# EAGLE board FlightPCB (EAGLE 9.5.2)
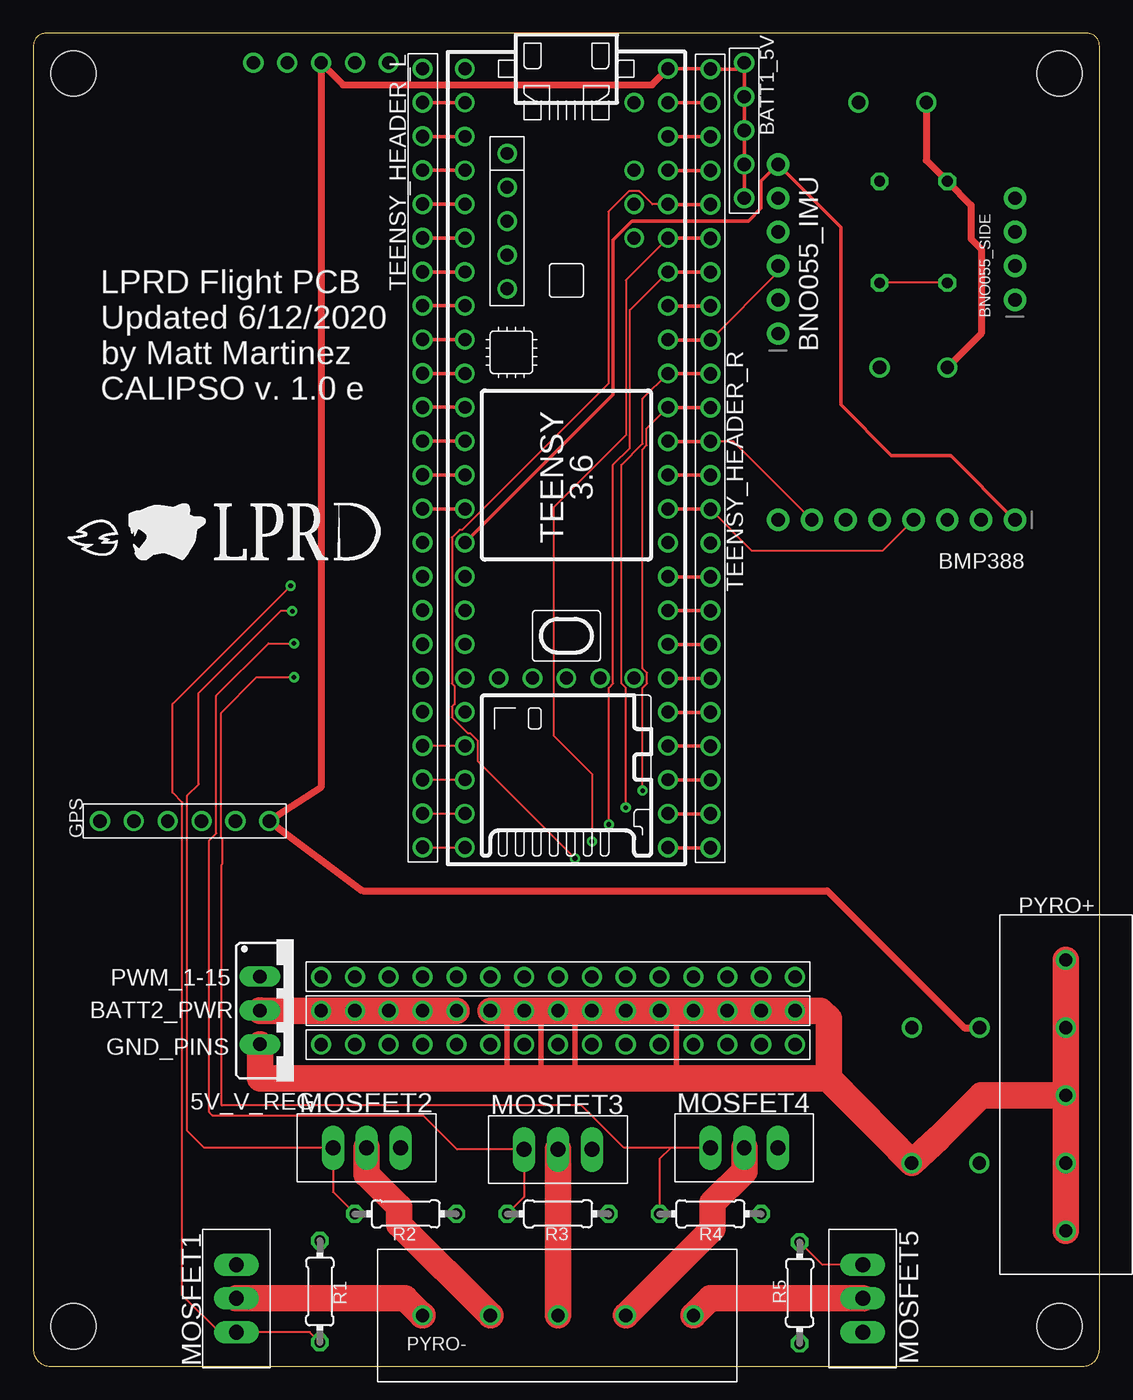
[diagram p0: board, top side]
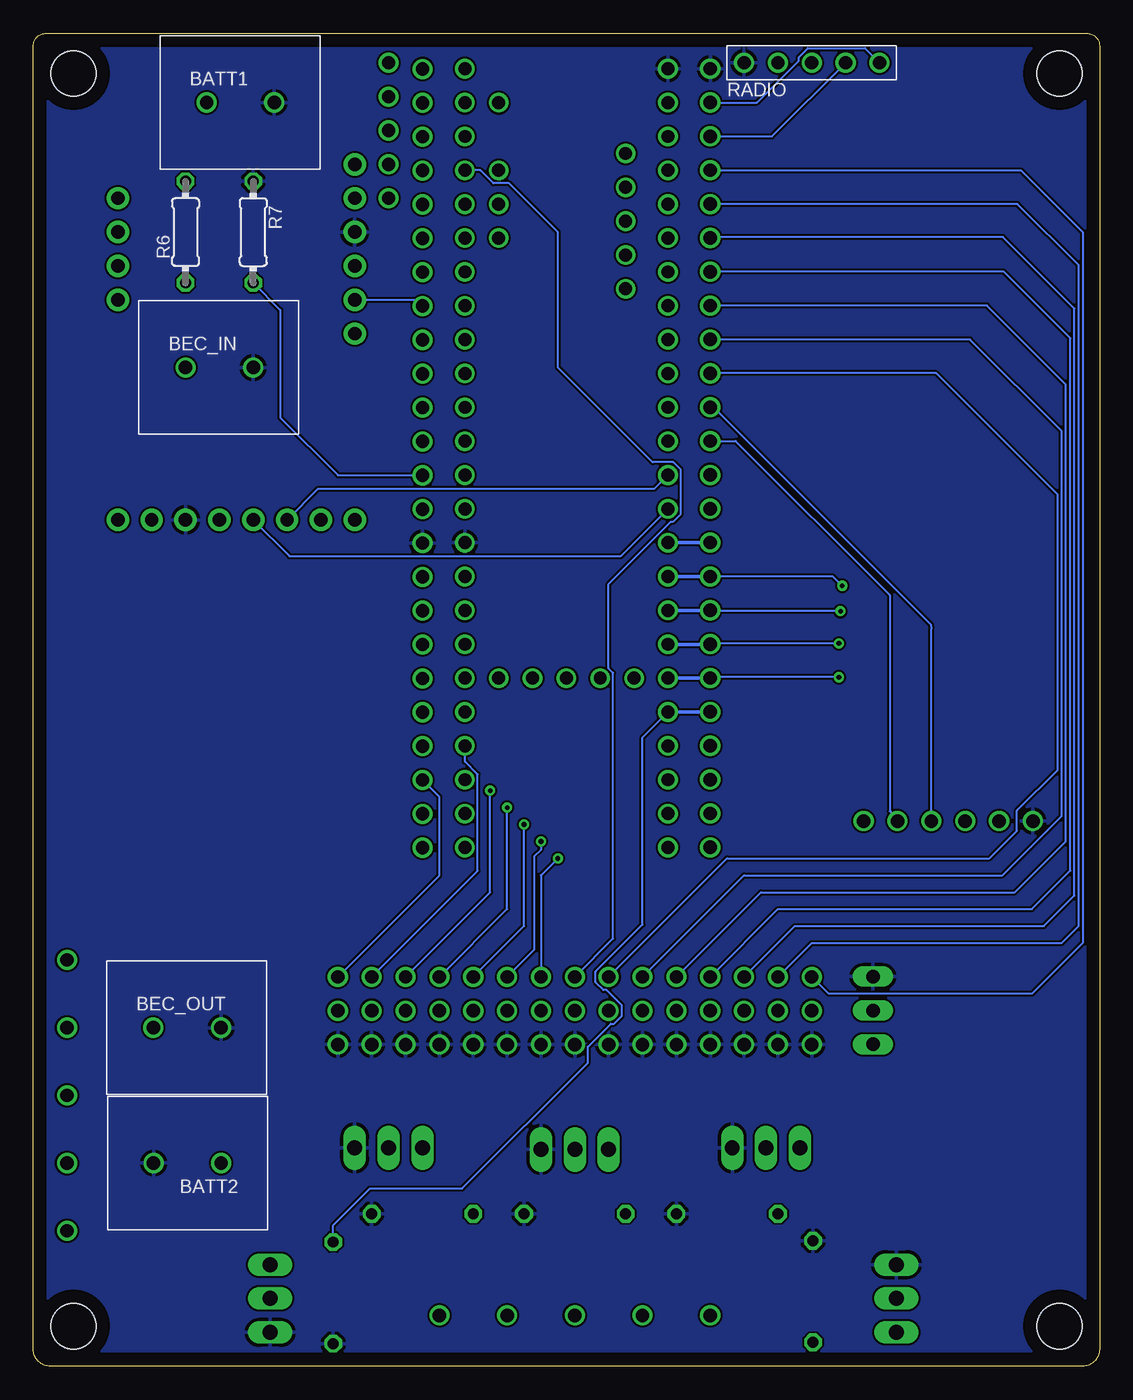
[diagram p1: board, bottom side, seen from below]

Size 80 x 100 mm. Coordinates in mm from the lower left corner, seen from the top.
Outline: 79.06,100 0.94,100 arc90 0,99.06 0,1.27 arc90 1.27,0 78.74,0 arc90 80,1.26 80,99.06 arc90 79.06,100
Copper layers (1*16): Top 0.035mm / dielectric 1.5mm / Bottom 0.035mm
Design rules "default *": minimum track width 6mil, minimum drill 0.35mm, track to track 6mil, track to pad 6mil, pad to pad 6mil, via to via 6mil, smd to smd 6mil, copper to edge 40mil, drill to drill 6mil, minimum pad ring 10mil, minimum via ring 8mil, stop-mask expansion 4mil, vias tented up to drill 0mil, thermal gap 10mil
Net classes: 1 Power Delivery: width 0.25 mm
Holes 3.4 mm at 3,97 3,3 77,97 77,3

## Footprints (pad centres in the part's own frame; a part is rotated, then mirrored left to right if it is on the bottom)
TO220S = drill 1.016 long: 1 -2.54,-2.54; 2 0,-2.54; 3 2.54,-2.54
TERMINAL_BLOCK_2_PIN_5MM = drill 1: P1 0,0; P2 0,-5.08
PIN_HEADER_5 = drill 1: P1 0,1.27; P2 0,-1.27; P3 0,-3.81; P4 0,-6.35; P5 0,-8.89
PIN_HEADER_15 = drill 1: P1 0,1.27; P2 0,-1.27; P3 0,-3.81; P4 0,-6.35; P5 0,-8.89; P6 0,-11.43; P7 0,-13.97; P8 0,-16.51; P9 0,-19.05; P10 0,-21.59; P11 0,-24.13; P12 0,-26.67; P13 0,-29.21; P14 0,-31.75; P15 0,-34.29
MICROBUILDER_1X08_ROUND = drill 1 pad 1.676: 1 -8.89,0; 2 -6.35,0; 3 -3.81,0; 4 -1.27,0; 5 1.27,0; 6 3.81,0; 7 6.35,0; 8 8.89,0
MICROBUILDER_1X06_ROUND = drill 1 pad 1.676: 1 -6.35,0; 2 -3.81,0; 3 -1.27,0; 4 1.27,0; 5 3.81,0; 6 6.35,0
MICROBUILDER_1X04_ROUND = drill 1 pad 1.676: 1 -3.81,0; 2 -1.27,0; 3 1.27,0; 4 3.81,0
TEENSY_3.5/3.6 = drill 0.965: 0/RX -25.4,-7.62; 1/TX -22.86,-7.62; 2 -20.32,-7.62; 3/CANTX -17.78,-7.62; 3V3 7.62,-7.62; 3V3_2 17.78,-2.54; 3V3_LO -22.86,7.62; 4/CANRX -15.24,-7.62; 5 -12.7,-7.62; 6 -10.16,-7.62; 7 -7.62,-7.62; 8 -5.08,-7.62; 9/CS -2.54,-7.62; 10/CS 0,-7.62; 11/MOSI 2.54,-7.62; 12/MISO 5.08,-7.62; 13/SCK 5.08,7.62; 14/A0 2.54,7.62; 15/A1 0,7.62; 16/A2 -2.54,7.62; 17/A3 -5.08,7.62; 18/A4/SDA -7.62,7.62; 19/A5/SCL -10.16,7.62; 20/A6 -12.7,7.62; 21/A7 -15.24,7.62; 21/DAC0 12.7,7.62; 22/A8 -17.78,7.62; 23/A9 -20.32,7.62; 24 10.16,-7.62; 25 12.7,-7.62; 26 15.24,-7.62; 27 17.78,-7.62; 28 20.32,-7.62; 29 22.86,-7.62; 30 25.4,-7.62; 31/A12 27.94,-7.62; 32/A13 30.48,-7.62; 33/A14 30.48,7.62; 34/A15 27.94,7.62; 35/A16 25.4,7.62; 36/A17 22.86,7.62; 37/A18 20.32,7.62; 38/A19 17.78,7.62; 39/A20 15.24,7.62; A10 -17.78,5.08; A11 -15.24,5.08; A22/DAC1 10.16,7.62; AGND -25.4,7.62; AREF -20.32,5.08; GND -27.94,-7.62; GND2 7.62,7.62; GND3 17.78,0; PROG 17.78,2.54; RESET 17.78,5.08; U5V -21.59,-4.445; UD+ -16.51,-4.445; UD- -19.05,-4.445; UGND1 -13.97,-4.445; UGND2 -11.43,-4.445; VBAT 17.78,-5.08; VIN -27.94,7.62; VUSB -25.4,5.08
NEO_M8N_GPS_BREAKOUT = drill 1: P1 0,0; P2 0,-2.54; P3 0,-5.08; P4 0,-7.62; P5 0,-10.16; P6 0,-12.7
TO220BH_SIMPLE = drill 1.118 long: D 0,-6.35; G -2.54,-6.35; S 2.54,-6.35
TERMINAL_BLOCK_5_PIN_5MM = drill 1: P1 0,0; P2 0,-5.08; P3 0,-10.16; P4 0,-15.24; P5 0,-20.32
0204/7 = drill 0.813 octagon: 1 -3.81,0; 2 3.81,0
RFD900 = drill 1: 1 0,1.27; 2 0,-1.27; 3 0,-3.81; 4 0,-6.35; 5 0,-8.89
PIN_HEADER_24_TEENSY_RAIL = drill 1: P1 0,1.27; P2 0,-1.27; P3 0,-3.81; P4 0,-6.35; P5 0,-8.89; P6 0,-11.43; P7 0,-13.97; P8 0,-16.51; P9 0,-19.05; P10 0,-21.59; P11 0,-24.13; P12 0,-26.67; P13 0,-29.21; P14 0,-31.75; P15 0,-34.29; P16 0,-36.83; P17 0,-39.37; P18 0,-41.91; P19 0,-44.45; P20 0,-46.99; P21 0,-49.53; P22 0,-52.07; P23 0,-54.61; P24 0,-57.15

## Placement (x,y rotation side)
5V_V_REG  LM1086TO220V  [TO220S]  19.54,26.69 270 top
BATT1  2-4S LIPO  [TERMINAL_BLOCK_2_PIN_5MM]  67,94.81 90 bottom
BATT1_5V  [PIN_HEADER_5]  53.34,96.52 0 top
BATT2  2-6S LIPO (>5.6V)  [TERMINAL_BLOCK_2_PIN_5MM]  65.9,15.24 270 bottom
BATT2_PWR  1-10=Batt2, 11-15=5V Reg  [PIN_HEADER_15]  55.88,26.67 270 top
BEC_IN  [TERMINAL_BLOCK_2_PIN_5MM]  68.58,74.93 90 bottom
BEC_OUT  [TERMINAL_BLOCK_2_PIN_5MM]  71,25.4 90 bottom
BMP388  [MICROBUILDER_1X08_ROUND]  64.77,63.5 180 top
BNO055_IMU  [MICROBUILDER_1X06_ROUND]  55.88,83.82 90 top
BNO055_SIDE  [MICROBUILDER_1X04_ROUND]  73.66,83.82 90 top
FLIGHT_COMPUTER  TEENSY_3.5/3.6  [TEENSY_3.5/3.6]  40,69.4 270 top
GND_PINS  [PIN_HEADER_15]  22.86,24.13 90 top
GPS  [NEO_M8N_GPS_BREAKOUT]  5,40.89 90 top
MOSFET1  IRLZ44Z  [TO220BH_SIMPLE]  8.89,5.08 90 top
MOSFET2  IRLZ44Z  [TO220BH_SIMPLE]  25.02,22.73 0 top
MOSFET3  IRLZ44Z  [TO220BH_SIMPLE]  39.37,22.61 0 top
MOSFET4  IRLZ44Z  [TO220BH_SIMPLE]  53.34,22.73 0 top
MOSFET5  IRLZ44Z  [TO220BH_SIMPLE]  68.58,5.08 270 top
PWM_1-15  [PIN_HEADER_15]  22.86,29.21 90 top
PYRO+  [TERMINAL_BLOCK_5_PIN_5MM]  77.47,30.48 0 top
PYRO-  [TERMINAL_BLOCK_5_PIN_5MM]  29.21,3.81 90 top
R1  10k  [0204/7]  21.5,5.6 90 top
R2  10k  [0204/7]  27.94,11.43 0 top
R3  10k  [0204/7]  39.37,11.43 0 top
R4  10k  [0204/7]  50.8,11.43 0 top
R5  10k  [0204/7]  57.5,5.5 270 top
R6  10k  [0204/7]  68.58,85.09 90 bottom
R7  2k  [0204/7]  63.5,85.09 270 bottom
RADIO  [RFD900]  25.4,97.79 90 bottom
TEENSY_HEADER_L  [PIN_HEADER_24_TEENSY_RAIL]  29.21,40.2 180 top
TEENSY_HEADER_R  [PIN_HEADER_24_TEENSY_RAIL]  50.8,96.05 0 top

## Library data of the parts
5V_V_REG = v-reg-2
BATT1 BATT1_5V BATT2 BATT2_PWR BEC_IN BEC_OUT GND_PINS GPS PWM_1-15 PYRO+ PYRO- RADIO TEENSY_HEADER_L TEENSY_HEADER_R = MattMtzLPRD
BMP388 = Adafruit BMP388
BNO055_IMU BNO055_SIDE = Adafruit BNO055
FLIGHT_COMPUTER = Teensy356
MOSFET1-MOSFET5 = transistor-power_MOD
R1-R7 = rcl; SPICEPREFIX: R

## Nets
+3V3 [Power Delivery]: BMP388.1 BNO055_IMU.6 FLIGHT_COMPUTER.3V3 TEENSY_HEADER_L.P10
+5V [Power Delivery]: BATT1_5V.P1 BATT1_5V.P2 BATT1_5V.P3 BATT1_5V.P4 BATT1_5V.P5 BEC_OUT.P1 FLIGHT_COMPUTER.VIN GPS.P6 RADIO.3 TEENSY_HEADER_R.P1
+5V/1 [Power Delivery]: 5V_V_REG.2 BATT2_PWR.P11 BATT2_PWR.P12 BATT2_PWR.P13 BATT2_PWR.P14 BATT2_PWR.P15
BATT1_READ_V: FLIGHT_COMPUTER.14/A0 R6.1 R7.2 TEENSY_HEADER_R.P13
BATT1_VCC [Power Delivery]: BATT1.P1 BEC_IN.P1 R6.2
BMP388_CS0: BMP388.7 FLIGHT_COMPUTER.15/A1 TEENSY_HEADER_R.P12
BMP388_SCK: BMP388.4 FLIGHT_COMPUTER.13/SCK TEENSY_HEADER_R.P14
BMP388_SDI/MOSI: BMP388.6 FLIGHT_COMPUTER.11/MOSI TEENSY_HEADER_L.P12
BMP388_SDO/MISO: BMP388.5 FLIGHT_COMPUTER.12/MISO TEENSY_HEADER_L.P11
BNO055_SCL: BNO055_IMU.2 FLIGHT_COMPUTER.19/A5/SCL TEENSY_HEADER_R.P8
BNO055_SDA: BNO055_IMU.3 FLIGHT_COMPUTER.18/A4/SDA TEENSY_HEADER_R.P9
CH1: MOSFET1.D PYRO-.P1
CH2: MOSFET2.D PYRO-.P2
CH3: MOSFET3.D PYRO-.P3
CH4: MOSFET4.D PYRO-.P4
CH5: MOSFET5.D PYRO-.P5
GND [Power Delivery]: 5V_V_REG.1 BATT1.P2 BATT2.P2 BEC_IN.P2 BEC_OUT.P2 BMP388.3 BNO055_IMU.4 FLIGHT_COMPUTER.GND FLIGHT_COMPUTER.GND2 GND_PINS.P1 GND_PINS.P2 GND_PINS.P3 GND_PINS.P4 GND_PINS.P5 GND_PINS.P6 GND_PINS.P7 GND_PINS.P8 GND_PINS.P9 GND_PINS.P10 GND_PINS.P11 GND_PINS.P12 GND_PINS.P13 GND_PINS.P14 GND_PINS.P15 GPS.P1 MOSFET1.S MOSFET2.S MOSFET3.S MOSFET4.S MOSFET5.S R1.2 R2.2 R3.2 R4.2 R5.2 R7.1 RADIO.1 TEENSY_HEADER_L.P24 TEENSY_HEADER_R.P15
GPS_RX: FLIGHT_COMPUTER.10/CS GPS.P5 TEENSY_HEADER_L.P13
GPS_TX: FLIGHT_COMPUTER.9/CS GPS.P4 TEENSY_HEADER_L.P14
N$1: FLIGHT_COMPUTER.AGND TEENSY_HEADER_R.P2
N$2: FLIGHT_COMPUTER.3V3_LO TEENSY_HEADER_R.P3
N$3: FLIGHT_COMPUTER.32/A13 TEENSY_HEADER_L.P1
N$5: FLIGHT_COMPUTER.31/A12 TEENSY_HEADER_L.P2
N$6: FLIGHT_COMPUTER.30 TEENSY_HEADER_L.P3
N$37: FLIGHT_COMPUTER.29 TEENSY_HEADER_L.P4
N$48: FLIGHT_COMPUTER.A22/DAC1 TEENSY_HEADER_R.P16
N$49: FLIGHT_COMPUTER.21/DAC0 TEENSY_HEADER_R.P17
N$50: FLIGHT_COMPUTER.39/A20 TEENSY_HEADER_R.P18
N$51: FLIGHT_COMPUTER.38/A19 TEENSY_HEADER_R.P19
N$52: FLIGHT_COMPUTER.37/A18 TEENSY_HEADER_R.P20
N$55: FLIGHT_COMPUTER.34/A15 TEENSY_HEADER_R.P23
N$56: FLIGHT_COMPUTER.33/A14 TEENSY_HEADER_R.P24
PWM2/3: FLIGHT_COMPUTER.3/CANTX PWM_1-15.P2 TEENSY_HEADER_L.P20
PWM3/4: FLIGHT_COMPUTER.4/CANRX PWM_1-15.P3 TEENSY_HEADER_L.P19
PWM4/5: FLIGHT_COMPUTER.5 PWM_1-15.P4 TEENSY_HEADER_L.P18
PWM5/6: FLIGHT_COMPUTER.6 PWM_1-15.P5 TEENSY_HEADER_L.P17
PWM6/7: FLIGHT_COMPUTER.7 PWM_1-15.P6 TEENSY_HEADER_L.P16
PWM7/8: FLIGHT_COMPUTER.8 PWM_1-15.P7 TEENSY_HEADER_L.P15
PWM8/23/A9: FLIGHT_COMPUTER.23/A9 PWM_1-15.P8 TEENSY_HEADER_R.P4
PWM9/22/A8: FLIGHT_COMPUTER.22/A8 PWM_1-15.P9 TEENSY_HEADER_R.P5
PWM10/21/A7: FLIGHT_COMPUTER.21/A7 PWM_1-15.P10 TEENSY_HEADER_R.P6
PWM11/20/A6: FLIGHT_COMPUTER.20/A6 PWM_1-15.P11 TEENSY_HEADER_R.P7
PWM12/17/A3: FLIGHT_COMPUTER.17/A3 PWM_1-15.P12 TEENSY_HEADER_R.P10
PWM13/16/A2: FLIGHT_COMPUTER.16/A2 PWM_1-15.P13 TEENSY_HEADER_R.P11
PWM14/36/A17: FLIGHT_COMPUTER.36/A17 PWM_1-15.P14 TEENSY_HEADER_R.P21
PWM15/35/A16: FLIGHT_COMPUTER.35/A16 PWM_1-15.P15 TEENSY_HEADER_R.P22
PWN1/2: FLIGHT_COMPUTER.2 PWM_1-15.P1 TEENSY_HEADER_L.P21
PYRO1: FLIGHT_COMPUTER.24 MOSFET1.G R1.1 TEENSY_HEADER_L.P9
PYRO2: FLIGHT_COMPUTER.25 MOSFET2.G R2.1 TEENSY_HEADER_L.P8
PYRO3: FLIGHT_COMPUTER.26 MOSFET3.G R3.1 TEENSY_HEADER_L.P7
PYRO4: FLIGHT_COMPUTER.27 MOSFET4.G R4.1 TEENSY_HEADER_L.P6
PYRO5: FLIGHT_COMPUTER.28 MOSFET5.G R5.1 TEENSY_HEADER_L.P5
RADIO_RX: FLIGHT_COMPUTER.1/TX RADIO.4 TEENSY_HEADER_L.P22
RADIO_TX: FLIGHT_COMPUTER.0/RX RADIO.5 TEENSY_HEADER_L.P23
VCC [Power Delivery]: 5V_V_REG.3 BATT2.P1 BATT2_PWR.P1 BATT2_PWR.P2 BATT2_PWR.P3 BATT2_PWR.P4 BATT2_PWR.P5 BATT2_PWR.P6 BATT2_PWR.P7 BATT2_PWR.P8 BATT2_PWR.P9 BATT2_PWR.P10 PYRO+.P1 PYRO+.P2 PYRO+.P3 PYRO+.P4 PYRO+.P5

## Tracks (layer width: path | path; a pad name or v marks a point on that pad's centre or on a via)
+3V3
  Top 0.25: BMP388.1 68.83,68.33 64.39,68.33 60.59,72.13 60.59,85.46 BNO055_IMU.6 54.61,88.9 54.61,86.87 53.65,85.91 44.92,85.91 43.49,84.49 43.49,72.89 FLIGHT_COMPUTER.3V3
  Bottom 0.25: FLIGHT_COMPUTER.3V3 TEENSY_HEADER_L.P10
+5V
  Top 0.25: FLIGHT_COMPUTER.VIN 50.78,97.34 TEENSY_HEADER_R.P1 52.86,97.32 52.88,97.33 BATT1_5V.P1 BATT1_5V.P2 BATT1_5V.P3 BATT1_5V.P4 BATT1_5V.P5
  Top 0.508: BEC_OUT.P1 69.85,25.4 59.58,35.67 24.71,35.67 GPS.P6 21.59,43.43 RADIO.3 23.24,96.14 46.42,96.14 FLIGHT_COMPUTER.VIN
+5V/1
  Top 2: 5V_V_REG.2 17.02,26.67 BATT2_PWR.P15 BATT2_PWR.P14 BATT2_PWR.P13 BATT2_PWR.P12 BATT2_PWR.P11
BATT1_READ_V
  Top 0.152: R6.1 R7.2
  Top 0.25: TEENSY_HEADER_R.P13 47.64,66.84 FLIGHT_COMPUTER.14/A0
  Bottom 0.152: R7.2 61.47,79.25 61.47,71.16 57.15,66.84 TEENSY_HEADER_R.P13
BATT1_VCC
  Top 0.508: BEC_IN.P1 71.12,77.47 71.12,83.82 70.36,84.58 70.36,87.12 R6.2 67,90.48 BATT1.P1
BMP388_CS0
  Top 0.152: BMP388.7 52.54,69.38 TEENSY_HEADER_R.P12
  Top 0.25: TEENSY_HEADER_R.P12 47.64,69.38 FLIGHT_COMPUTER.15/A1
BMP388_SCK
  Top 0.152: BMP388.4 63.7,61.16 53.94,61.16 TEENSY_HEADER_R.P14
  Top 0.25: TEENSY_HEADER_R.P14 47.64,64.3 FLIGHT_COMPUTER.13/SCK
BMP388_SDI/MOSI
  Top 0.25: FLIGHT_COMPUTER.11/MOSI TEENSY_HEADER_L.P12
  Bottom 0.152: BMP388.6 58.62,65.84 33.4,65.84 FLIGHT_COMPUTER.11/MOSI
BMP388_SDO/MISO
  Top 0.25: FLIGHT_COMPUTER.12/MISO TEENSY_HEADER_L.P11
  Bottom 0.152: BMP388.5 60.78,60.78 35.92,60.78 FLIGHT_COMPUTER.12/MISO
BNO055_SCL
  Top 0.25: TEENSY_HEADER_R.P8 47.64,79.54 FLIGHT_COMPUTER.19/A5/SCL
  Bottom 0.152: TEENSY_HEADER_R.P8 51.27,80.01 BNO055_IMU.2
BNO055_SDA
  Top 0.152: BNO055_IMU.3 55.88,82.08 TEENSY_HEADER_R.P9
  Top 0.25: TEENSY_HEADER_R.P9 47.64,77 FLIGHT_COMPUTER.18/A4/SDA
CH1
  Top 2: PYRO-.P1 29.16,3.81 27.89,5.08 MOSFET1.D
CH2
  Top 2: PYRO-.P2 27.45,10.65 27.45,11.95 25.02,14.38 MOSFET2.D
CH3
  Top 2: MOSFET3.D PYRO-.P3
CH4
  Top 2: MOSFET4.D 53.34,14.63 50.95,12.25 50.95,10.31 PYRO-.P4
CH5
  Top 2: MOSFET5.D 50.8,5.08 PYRO-.P5
GND
  pour Bottom: -1.27,101.6 81.28,101.6 81.28,-1.27 -1.27,-1.27
GPS_RX
  Top 0.25: FLIGHT_COMPUTER.10/CS TEENSY_HEADER_L.P13
  Bottom 0.152: TEENSY_HEADER_L.P13 27.3,69.41 15.75,57.85 15.75,41.66 GPS.P5
GPS_TX
  Top 0.25: FLIGHT_COMPUTER.9/CS TEENSY_HEADER_L.P14
  Bottom 0.152: TEENSY_HEADER_L.P14 28.96,71.95 12.65,55.64 12.62,55.3 GPS.P4
N$1
  Top 0.25: TEENSY_HEADER_R.P2 47.64,94.78 FLIGHT_COMPUTER.AGND
N$2
  Top 0.25: TEENSY_HEADER_R.P3 47.64,92.24 FLIGHT_COMPUTER.3V3_LO
N$3
  Top 0.152: TEENSY_HEADER_L.P1 FLIGHT_COMPUTER.32/A13
N$5
  Top 0.152: TEENSY_HEADER_L.P2 FLIGHT_COMPUTER.31/A12
N$6
  Top 0.152: TEENSY_HEADER_L.P3 FLIGHT_COMPUTER.30
N$37
  Top 0.152: FLIGHT_COMPUTER.29 TEENSY_HEADER_L.P4
N$48
  Top 0.25: TEENSY_HEADER_R.P16 47.64,59.22 FLIGHT_COMPUTER.A22/DAC1
N$49
  Top 0.25: TEENSY_HEADER_R.P17 47.64,56.68 FLIGHT_COMPUTER.21/DAC0
N$50
  Top 0.25: TEENSY_HEADER_R.P18 47.64,54.14 FLIGHT_COMPUTER.39/A20
N$51
  Top 0.25: TEENSY_HEADER_R.P19 47.64,51.6 FLIGHT_COMPUTER.38/A19
N$52
  Top 0.25: TEENSY_HEADER_R.P20 47.64,49.06 FLIGHT_COMPUTER.37/A18
N$55
  Top 0.25: TEENSY_HEADER_R.P23 47.64,41.44 FLIGHT_COMPUTER.34/A15
N$56
  Top 0.25: TEENSY_HEADER_R.P24 47.64,38.9 FLIGHT_COMPUTER.33/A14
PWM2/3
  Top 0.25: FLIGHT_COMPUTER.3/CANTX TEENSY_HEADER_L.P20
  Bottom 0.152: PWM_1-15.P2 21.59,31.75 2.85,31.75 1.57,33.02 1.57,82.6 6.16,87.19 TEENSY_HEADER_L.P20
PWM3/4
  Top 0.25: FLIGHT_COMPUTER.4/CANRX TEENSY_HEADER_L.P19
  Bottom 0.152: PWM_1-15.P3 22.86,33.02 4.17,33.02 1.88,35.31 1.88,79.35 7.24,84.71 29.15,84.71 TEENSY_HEADER_L.P19
PWM4/5
  Top 0.25: FLIGHT_COMPUTER.5 TEENSY_HEADER_L.P18
  Bottom 0.152: PWM_1-15.P4 24.13,34.29 5.08,34.29 2.18,37.19 2.18,77.11 7.18,82.11 TEENSY_HEADER_L.P18
PWM5/6
  Top 0.25: FLIGHT_COMPUTER.6 TEENSY_HEADER_L.P17
  Bottom 0.152: PWM_1-15.P5 25.4,35.56 6.35,35.56 2.54,39.37 2.54,73.66 8.45,79.57 TEENSY_HEADER_L.P17
PWM6/7
  Top 0.25: FLIGHT_COMPUTER.7 TEENSY_HEADER_L.P16
  Bottom 0.152: PWM_1-15.P6 26.67,36.83 7.29,36.83 2.85,41.27 2.85,70.16 9.72,77.03 TEENSY_HEADER_L.P16
PWM7/8
  Top 0.25: FLIGHT_COMPUTER.8 TEENSY_HEADER_L.P15
  Bottom 0.152: PWM_1-15.P7 27.94,38.1 8.26,38.1 6.19,40.16 6.19,41.68 3.15,44.72 3.15,65.38 12.26,74.49 TEENSY_HEADER_L.P15
PWM8/23/A9
  Top 0.25: TEENSY_HEADER_R.P4 47.64,89.7 FLIGHT_COMPUTER.23/A9
  Bottom 0.152: FLIGHT_COMPUTER.23/A9 46.45,89.72 45.48,88.75 44.3,88.75 40.64,85.09 40.64,74.93 33.53,67.83 31.98,67.83 31.41,67.26 31.41,63.92 31.98,63.35 32.17,63.35 36.83,58.7 36.83,52.35 36.49,52.02 36.49,32.09 PWM_1-15.P8
PWM9/22/A8  (via drill 0.35)
  Top 0.152: FLIGHT_COMPUTER.22/A8 46.45,87.18 45.48,88.14 44.68,88.14 43.14,86.6 43.14,73.71 32.17,62.74 31.98,62.74 31.41,62.18 31.41,51.22 31.61,51.03 31.61,49.67 31.41,49.48 31.41,48.68 32.59,47.51 32.78,47.51 33.34,46.94 33.34,45.4 v40.64,38.1
  Top 0.25: TEENSY_HEADER_R.P5 47.64,87.16 FLIGHT_COMPUTER.22/A8
  Bottom 0.152: v40.64,38.1 41.91,36.83 PWM_1-15.P9
PWM10/21/A7  (via drill 0.35)
  Top 0.152: FLIGHT_COMPUTER.21/A7 44.45,81.47 44.45,69.85 39.03,64.44 39.03,47.33 41.91,44.45 v41.91,39.37
  Top 0.25: TEENSY_HEADER_R.P6 47.64,84.62 FLIGHT_COMPUTER.21/A7
  Bottom 0.152: v41.91,39.37 41.91,38.73 42.42,38.23 42.42,31.24 PWM_1-15.P10
PWM11/20/A6  (via drill 0.35)
  Top 0.152: v43.18,40.64 43.18,50.9 43.51,51.22 43.51,67.64 44.76,68.89 44.76,79.23 FLIGHT_COMPUTER.20/A6
  Top 0.25: TEENSY_HEADER_R.P7 47.64,82.08 FLIGHT_COMPUTER.20/A6
  Bottom 0.152: PWM_1-15.P11 43.18,33.02 v43.18,40.64
PWM12/17/A3  (via drill 0.35)
  Top 0.152: v44.45,41.91 44.45,50.88 44.12,51.22 44.12,67.61 45.72,69.22 45.72,72.58 FLIGHT_COMPUTER.17/A3
  Top 0.25: TEENSY_HEADER_R.P10 47.64,74.46 FLIGHT_COMPUTER.17/A3
  Bottom 0.152: PWM_1-15.P12 44.45,34.29 v44.45,41.91
PWM13/16/A2  (via drill 0.35)
  Top 0.152: v45.72,43.18 45.72,50.9 46.05,51.22 46.05,52.02 45.72,52.34 45.72,68.78 46.02,69.09 46.02,70.34 FLIGHT_COMPUTER.16/A2
  Top 0.25: TEENSY_HEADER_R.P11 47.64,71.92 FLIGHT_COMPUTER.16/A2
  Bottom 0.152: PWM_1-15.P13 45.72,35.56 v45.72,43.18
PWM14/36/A17
  Top 0.25: TEENSY_HEADER_R.P21 47.64,46.52 FLIGHT_COMPUTER.36/A17
  Bottom 0.152: FLIGHT_COMPUTER.36/A17 47.62,45.37 46.66,44.4 46.66,37.16 PWM_1-15.P14
PWM15/35/A16
  Top 0.25: FLIGHT_COMPUTER.35/A16 50.78,44 TEENSY_HEADER_R.P22
  Bottom 0.152: PWM_1-15.P15 49.53,36.83 49.53,42.71 TEENSY_HEADER_R.P22
PWN1/2
  Top 0.25: FLIGHT_COMPUTER.2 TEENSY_HEADER_L.P21
  Bottom 0.152: TEENSY_HEADER_L.P21 5.91,89.73 1.27,85.09 1.27,31.75 5.08,27.94 20.32,27.94 PWM_1-15.P1
PYRO1  (via drill 0.35)
  Top 0.152: R1.1 20.74,2.55 15.25,2.55 MOSFET1.G 13.97,2.54 11.18,5.33 11.18,42.3 10.45,43.03 10.45,49.69 v19.3,58.55
  Bottom 0.152: v19.3,58.55 20.01,59.25 TEENSY_HEADER_L.P9
  Bottom 0.25: FLIGHT_COMPUTER.24 TEENSY_HEADER_L.P9
PYRO2  (via drill 0.35)
  Top 0.152: R2.1 22.48,13.08 MOSFET2.G 12.83,16.38 11.56,17.65 11.56,42.81 12.41,43.66 12.41,50.51 18.54,56.64 v19.43,56.64
  Bottom 0.152: v19.43,56.64 29.14,56.64 TEENSY_HEADER_L.P8
  Bottom 0.25: FLIGHT_COMPUTER.25 TEENSY_HEADER_L.P8
PYRO3  (via drill 0.35)
  Top 0.152: R3.1 36.83,12.7 MOSFET3.G 31.81,16.26 29.27,18.8 13.46,18.8 13.21,19.05 13.21,39.45 13.73,39.98 13.73,50.31 17.65,54.23 v19.56,54.23
  Bottom 0.152: v19.56,54.23 29.15,54.23 TEENSY_HEADER_L.P7
  Bottom 0.25: FLIGHT_COMPUTER.26 TEENSY_HEADER_L.P7
PYRO4  (via drill 0.35)
  Top 0.152: R4.1 46.99,15.54 47.83,16.38 MOSFET4.G 44.32,16.38 41.15,19.56 14.15,19.56 14.15,37.64 14.19,37.69 14.19,39.52 14.1,39.62 14.1,49.02 16.76,51.69 v19.56,51.69
  Bottom 0.152: v19.56,51.69 29.15,51.69 TEENSY_HEADER_L.P6
  Bottom 0.25: FLIGHT_COMPUTER.27 TEENSY_HEADER_L.P6
PYRO5
  Top 0.152: MOSFET5.G 59.19,7.62 R5.1
  Bottom 0.152: R5.1 57.5,10.58 54.74,13.34 47.82,13.34 38.39,22.77 38.39,23.96 36.66,25.69 36.42,25.69 35.85,26.26 35.85,27.08 37,28.23 37.24,28.23 37.81,28.8 37.81,29.62 34.29,33.14 34.29,47.17 FLIGHT_COMPUTER.28
  Bottom 0.25: TEENSY_HEADER_L.P5 FLIGHT_COMPUTER.28
RADIO_RX
  Top 0.25: FLIGHT_COMPUTER.1/TX TEENSY_HEADER_L.P22
  Bottom 0.152: TEENSY_HEADER_L.P22 24.57,92.27 RADIO.4
RADIO_TX
  Top 0.25: FLIGHT_COMPUTER.0/RX TEENSY_HEADER_L.P23
  Bottom 0.152: TEENSY_HEADER_L.P23 25.72,94.81 22.57,97.96 22.57,98.2 21.89,98.88 17.6,98.88 RADIO.5
VCC
  Top 0.406: 35.56,26.67 35.56,21.59 | 38.1,26.67 38.1,21.59 | 40.64,26.67 40.64,21.59 | 48.26,26.67 48.26,21.59
  Top 2: BATT2.P1 59.68,21.46 59.68,26.05 59.07,26.67 BATT2_PWR.P1 BATT2_PWR.P2 BATT2_PWR.P3 BATT2_PWR.P4 48.26,26.67 BATT2_PWR.P5 BATT2_PWR.P6 BATT2_PWR.P7 40.64,26.67 BATT2_PWR.P8 38.1,26.67 BATT2_PWR.P9 35.56,26.67 BATT2_PWR.P10 | 5V_V_REG.3 17,21.59 35.56,21.59 38.1,21.59 40.64,21.59 48.26,21.59 59.69,21.59 BATT2.P1 | PYRO+.P3 71.12,20.32 67.94,17.14 | 67.94,17.14 | 67.94,17.14 BATT2.P1 | PYRO+.P1 PYRO+.P2 PYRO+.P3 | PYRO+.P3 PYRO+.P4 PYRO+.P5

## Text on the board
tPlace: LPRD Flight PCB / Updated 6/12/2020 / by Matt Martinez / CALIPSO v. 1.0 e